# EAGLE board eggfckr-topoR (EAGLE 6.0)
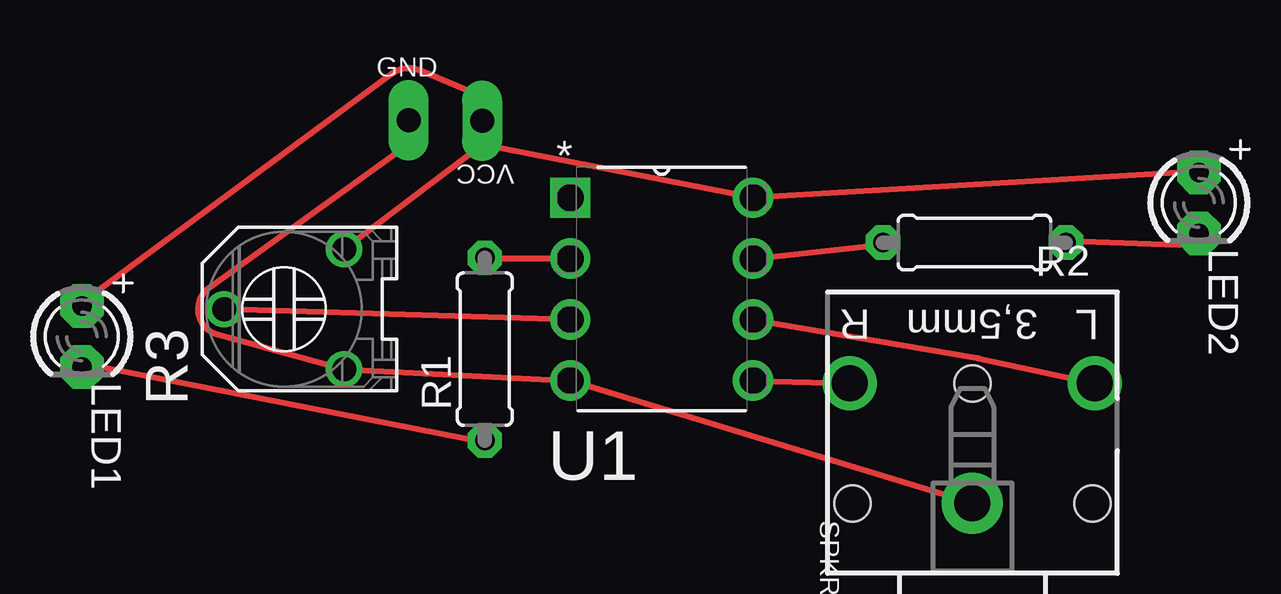
[diagram p0: board, top side]

No outline drawn. Coordinates in mm, seen from the top.
Copper layers 1+16: TOP 0.035mm / dielectric 0.15mm / BOTTOM 0.035mm
Design rules: minimum track width 0.254mm, track to track 0.2032mm, copper to edge 1.016mm, minimum pad ring 0.1mm, minimum via ring 0.1mm
Net classes: 0 default: width 0.254 mm, clearance 0.203 mm

## Footprints (pad centres in the part's own frame; a part is rotated, then mirrored left to right if it is on the bottom)
1X01_OVAL = drill 1 pad 1.676 long: 1 0,0
LED3MM = drill 0.813 pad 1.815 octagon: A -1.27,0; K 1.27,0
0207/7 = drill 0.813 pad 1.429 octagon: 1 -3.81,0; 2 3.81,0
TRIMMER_3306F = drill 1 pad 1.508: 1 -2.5,-2.5; 2 0,2.5; 3 2.5,-2.5
STX3100 = drill 1.5 pad 2.54: 1 2.7,-0.1 | drill 1.5 pad 2.25: 2 7.7,5; 3 7.7,-5.2 | hole 1.5: 7.7,-0.1; 2.7,-5.1; 2.7,4.9
DIP254P762X533-8 = drill 1.118 pad 1.676 square: 1 -7.62,7.62 | drill 1.118 pad 1.676: 2 -7.62,5.08; 3 -7.62,2.54; 4 -7.62,0; 5 0,0; 6 0,2.54; 7 0,5.08; 8 0,7.62

## Placement (x,y rotation side)
GND  [1X01_OVAL]  12.28,23.94 0 top
LED1  [LED3MM]  -1.33,14.93 270 top
LED2  [LED3MM]  45.22,20.5 270 top
R1  [0207/7]  15.46,14.41 90 top
R2  [0207/7]  35.86,18.85 180 top
R3  [TRIMMER_3306F]  7.1,16.07 90 top
SPKR  [STX3100]  35.68,5.28 90 top
U1  ATTINY85-20PU  [DIP254P762X533-8]  26.64,13.1 0 top
VCC  [1X01_OVAL]  15.35,23.93 180 top

## Library data of the parts
GND R1-R3 SPKR U1 VCC = eggfckr
LED1 LED2 = adafruit

## Nets
GND: GND.1 R3.1 SPKR.1 U1.4
N$1: R2.2 U1.7
N$2: R3.2 U1.3
N$3: SPKR.3 U1.6
N$4: R1.2 U1.2
N$5: SPKR.2 U1.5
N$6: LED1.K R1.1
N$7: LED2.K R2.1
VCC: LED1.A LED2.A R3.3 U1.8 VCC.1

## Tracks (layer width: path | path; a pad name or v marks a point on that pad's centre or on a via)
GND
  TOP 0.254: GND.1 12.28,22.94 3.96,16.95 arc129 4.31,15.03 R3.1 U1.4 SPKR.1
N$1
  TOP 0.254: U1.7 31.38,18.7 arc-6 31.39,18.7 31.52,18.7 R2.2
N$2
  TOP 0.254: U1.3 R3.2
N$3
  TOP 0.254: U1.6 35.96,14.04 arc-3 36.01,14.04 SPKR.3
N$4
  TOP 0.254: U1.2 16.12,18.18 15.99,18.18 R1.2
N$5
  TOP 0.254: U1.5 SPKR.2
N$6
  TOP 0.254: R1.1 14.93,10.65 14.8,10.65 arc-11 14.76,10.66 -0.43,13.64 arc11 -0.49,13.65 -0.62,13.65 LED1.K
N$7
  TOP 0.254: R2.1 40.21,18.91 40.33,18.91 arc-2 40.34,18.91 44.37,18.76 44.38,18.76 arc45 44.47,18.8 44.56,18.89 LED2.K
VCC
  TOP 0.254: LED2.A 44.5,21.76 44.38,21.76 arc3 44.36,21.76 U1.8 15.35,22.93 | 15.35,22.93 VCC.1 | VCC.1 15.35,22.93 | 15.35,22.93 R3.3 | VCC.1 15.35,24.93 12.73,26.02 arc59 11.59,25.88 -0.69,16.82 arc8 -0.72,16.79 -0.73,16.78 -0.82,16.69 LED1.A